# Altium PCB master.PcbDoc
Units mil, origin at the board's own origin, x right, y up, seen from the top; angles counter-clockwise.
Board outline 6000 x 4000 mil, 2 copper layers (Top Layer, Bottom Layer); 35 components, 49 nets, 164 pads, 10 vias.
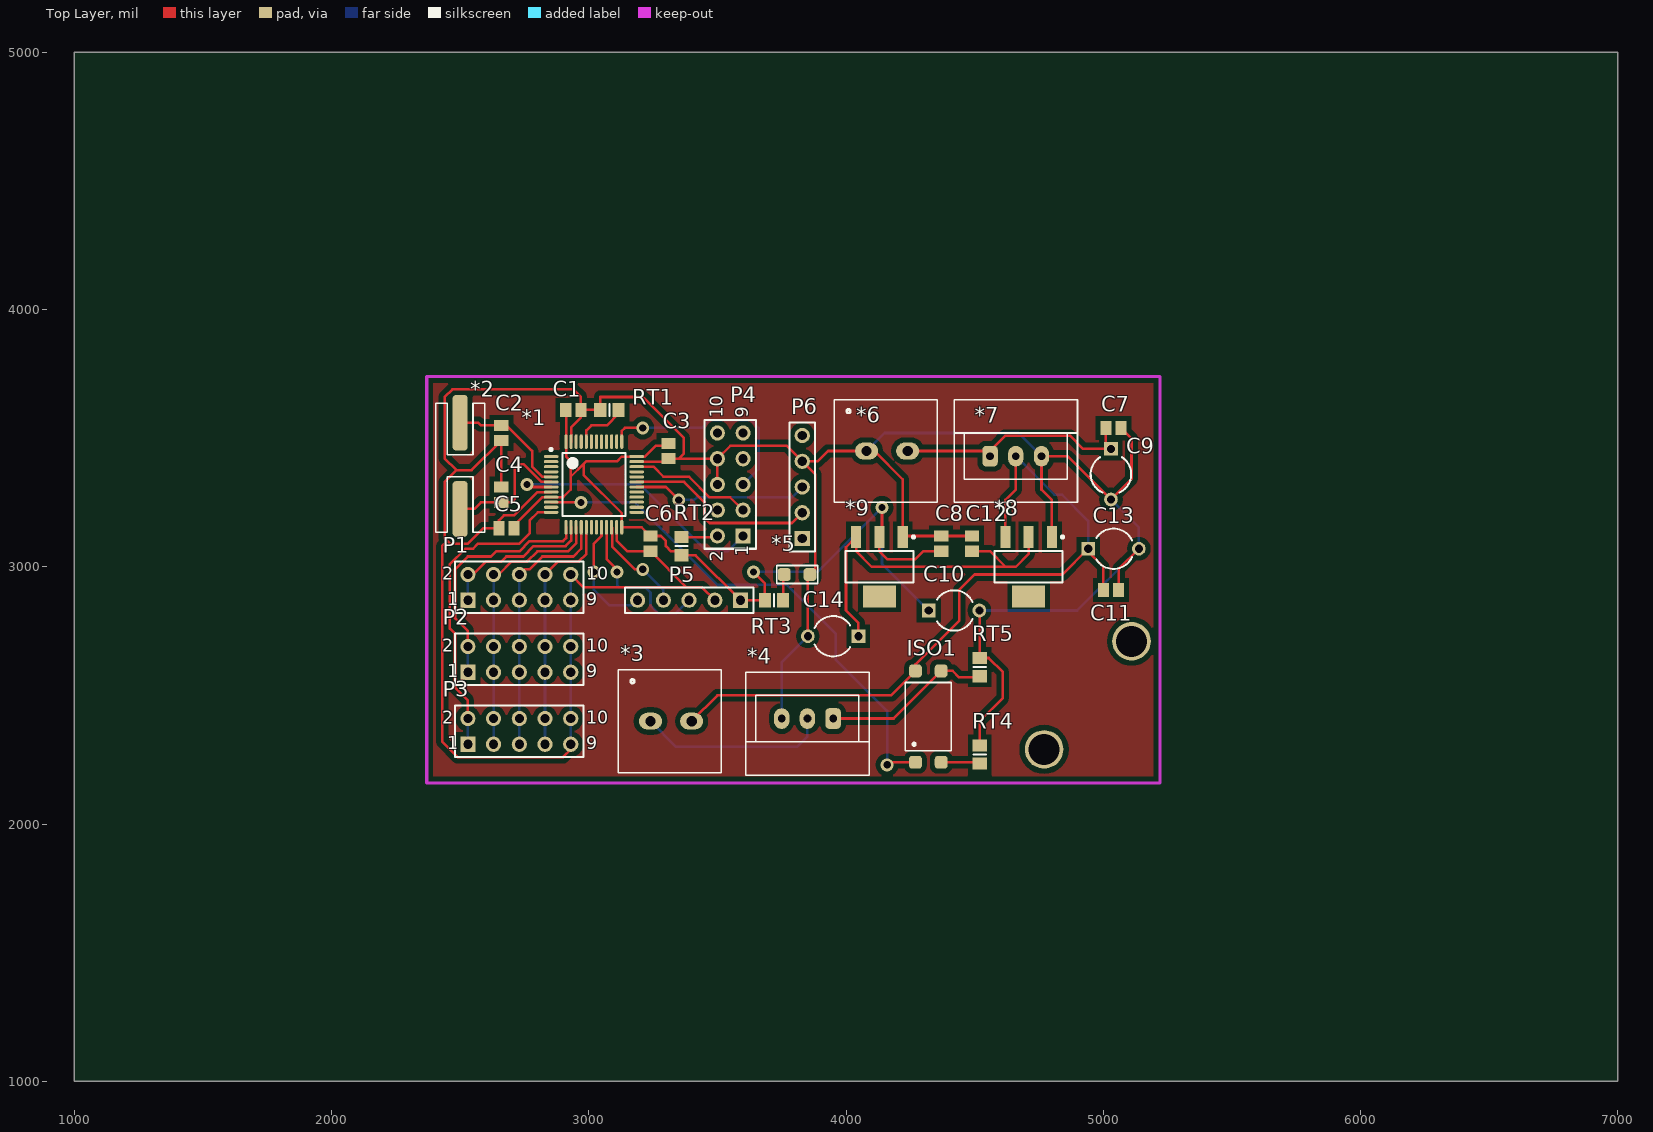
[diagram p0: Top Layer view]
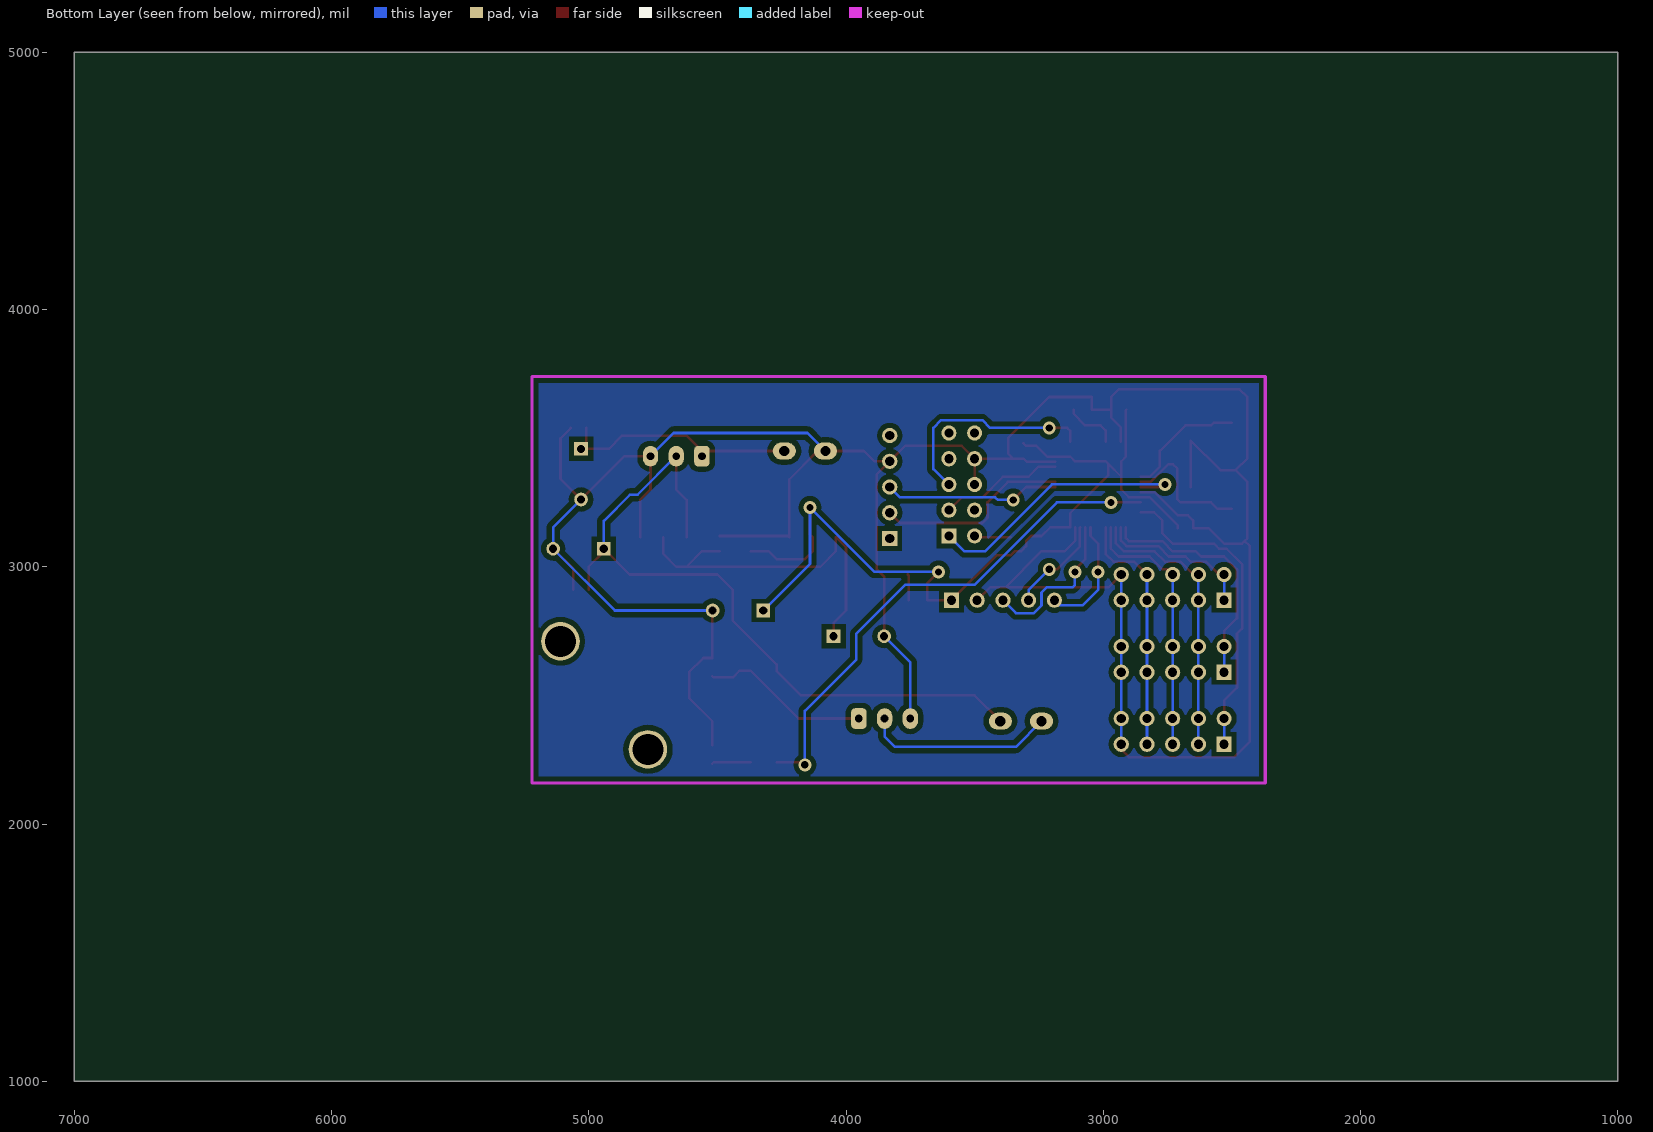
[diagram p1: Bottom Layer view, seen from below]

## Layer stack, top to bottom
Top Solder: solder mask 0.4, Solder Resist, Dk 3.5
Top Layer: signal copper 1.4
Dielectric 1: dielectric 12.6, FR-4, Dk 4.8
Bottom Layer: signal copper 1.4
Bottom Solder: solder mask 0.4, Solder Resist, Dk 3.5

## Board outline
1000,1000 7000,1000 7000,5000 1000,5000

## Design rules (kind name [scope] priority, off if disabled: settings)
Clearance "PolyGon Pour Clearance" [InPolyGon] p1: gap=20
Clearance [All] p2: gap=7
Height [All] p1 off: minheight=0 maxheight=1000 prefheight=500
PolygonConnect [All] p1: connectstyle=Relief reliefconductorwidth=10 reliefentries=4 polygonreliefangle="90 Angle" airgapwidth=10
RoutingVias [All] p1: holewidth=28 width=50 viastyle="Through Hole" minholewidth=28 minwidth=50 maxholewidth=28 maxwidth=50
SolderMaskExpansion [All] p1: expansion=4
UnpouredPolygon [All] p1: allowunpoured=FALSE
Width [All] p1: maxlimit=25 minlimit=10 preferedwidth=11 minimp=50.000000 maximp=50.000000 favimp=50.000000
28 further rules are at their usual default settings.

## Components (designator, comment, footprint, x,y, rotation, side; value= is the part's Value field where it differs from the comment)
*1 "stm32f103c8t6" LQFP48_stm32 3020,3320 r0 top
*2 "XTAL" xtal_smd 2500,3560 r270 top
*3 "domino2" Domino_2 3240,2400 r0 top
*4 "IRF540N" TO220 3850,2410 r180 top
*5 "led_smd" led_smd 3810,2970 r0 top
*6 "domino2" Domino_2 4080,3450 r0 top
*7 "L7812" TO220 4660,3430 r0 top
*8 "ASM1117-5" SOT223 4710,3000 r270 top
*9 "ASM1117-5" SOT223 4130,3000 r270 top
C1 "Cap Pol3" C0805 2940,3610 r0 top
C2 "Cap Pol3" C0805 2660,3520 r270 top
C3 "Cap Pol3" C0805 3310,3450 r270 top
C4 "Cap Pol3" C0805 2660,3280 r90 top
C5 "Cap Pol3" C0805 2680,3150 r180 top
C6 "Cap Pol3" C0805 3240,3090 r270 top
C7 "Cap Pol3" C0805 5040,3540 r0 top
C8 "Cap Pol3" C0805 4370,3090 r90 top
C9 "Cap2" CAPR5-4X5 5030,3360 r270 top
C10 "Cap2" CAPR5-4X5 4420,2830 r0 top
C11 "Cap Pol3" C0805 5030,2910 r0 top
C12 "Cap Pol3" C0805 4490,3090 r90 top
C13 "Cap2" CAPR5-4X5 5040,3070 r0 top
C14 "Cap2" CAPR5-4X5 3950,2730 r180 top
ISO1 "opto" opto_smd 4270,2240 r90 top
P1 "Header 5X2" HDR2X5 2530,2870 r0 top
P2 "Header 5X2" HDR2X5 2530,2590 r0 top
P3 "Header 5X2" HDR2X5 2530,2310 r0 top
P4 "Header 5X2" HDR2X5 3600,3120 r90 top
P5 "Header 5" HDR1X5 3590,2870 r180 top
P6 "Header 5" HDR1X5 3830,3110 r90 top
RT1 "Res Thermal" 6-0805_N 3080,3610 r0 top
RT2 "Res Thermal" 6-0805_N 3360,3080 r270 top
RT3 "Res Thermal" 6-0805_N 3720,2870 r180 top
RT4 "Res Thermal" 6-0805_N 4520,2270 r90 top
RT5 "Res Thermal" 6-0805_N 4520,2610 r90 top

## Footprints (in the part's own frame and the unit in brackets; to place one, negate y for a bottom-side part, rotate by r counter-clockwise, add the part's x,y. Pads: shape width x height; smd on the part's side, far side on the other; paste and mask are expansions set on the pad)
6-0805_N [mm] "Chip Resistor, Body 2.0x1.2mm, IPC Medium Density"
  rect 1.2x1.4 smd: 1(-0.9,0) 2(0.9,0)
  silkscreen extent 0,-0.6 0,0.6, body extent -1.07,-0.7 1.07,0.7, height 0.7
C0805 [mm] "Chip Capacitor, Body 2.0x1.3mm, IPC High Density"
  rect 1.1x1.4 smd: 1(-0.75,0) 2(0.75,0)
  body extent -1.1,-0.72 1.1,0.72, height 1.4
CAPR5-4X5 [mm] "Capacitor; 2 Leads"
  rect 1.35x1.35 hole 0.8: 1(-2.5,0)
  round 1.35 hole 0.8: 2(2.5,0)
  silkscreen extent -1.69,-2 1.82,2
Domino_2 [mil]
  oval 90x65 hole 40: 1(0,0) 2(160,0)
  silkscreen extent -125,-200 275,200
HDR1X5 [mm] "Connector; Header; 5 Position"
  rect 1.5x1.5 hole 0.9: 1(0,0)
  round 1.5 hole 0.9: 2(2.54,0) 3(5.08,0) 4(7.62,0) 5(10.16,0)
  silkscreen extent -1.27,-1.27 11.43,1.27
HDR2X5 [mm] "Connector; Header; 5x2 Position"
  rect 1.5x1.5 hole 0.9: 1(0,0)
  round 1.5 hole 0.9: 2(0,2.54) 3(2.54,0) 4(2.54,2.54) 5(5.08,0) 6(5.08,2.54) 7(7.62,0) 8(7.62,2.54) 9(10.16,0) 10(10.16,2.54)
  silkscreen extent -1.27,-1.27 11.43,3.81
led_smd [mil]
  rrect50% 50x50 smd: 1(-50,0) 2(50,0)
  silkscreen extent -80,-35 80,35
LQFP48_stm32 [mm] "TSQFP, 48-Leads, Body 7.00x7.00mm, Pitch 0.50mm, IPC Medium Density"
  oval 1.45x0.3 smd: 1(-4.225,2.75) 2(-4.225,2.25) 3(-4.225,1.75) 4(-4.225,1.25) 5(-4.225,0.75) 6(-4.225,0.25) 7(-4.225,-0.25) 8(-4.225,-0.75) 9(-4.225,-1.25) 10(-4.225,-1.75) 11(-4.225,-2.25) 12(-4.225,-2.75) 25(4.225,-2.75) 26(4.225,-2.25) 27(4.225,-1.75) 28(4.225,-1.25) 29(4.225,-0.75) 30(4.225,-0.25) 31(4.225,0.25) 32(4.225,0.75) 33(4.225,1.25) 34(4.225,1.75) 35(4.225,2.25) 36(4.225,2.75)
  oval 0.3x1.45 smd: 13(-2.75,-4.225) 14(-2.25,-4.225) 15(-1.75,-4.225) 16(-1.25,-4.225) 17(-0.75,-4.225) 18(-0.25,-4.225) 19(0.25,-4.225) 20(0.75,-4.225) 21(1.25,-4.225) 22(1.75,-4.225) 23(2.25,-4.225) 24(2.75,-4.225) 37(2.75,4.225) 38(2.25,4.225) 39(1.75,4.225) 40(1.25,4.225) 41(0.75,4.225) 42(0.25,4.225) 43(-0.25,4.225) 44(-0.75,4.225) 45(-1.25,4.225) 46(-1.75,4.225) 47(-2.25,4.225) 48(-2.75,4.225)
  silkscreen extent -4.35,-3.1 3.1,3.57, body extent -3.5,-3.5 3.5,3.5, height 1.6
opto_smd [mil]
  rrect50% 50x50 smd: 1(0,0) 2(0,-100) 3(355,-100) 4(355,0)
  silkscreen extent 45,-140 310,40
SOT223 [mm] "SOT223, 4-Leads, Body 6.50x7.00mm (avg), Pitch 2.30mm, IPC Medium Density"
  rect 2.15x1 smd: 1(-2.93,2.3) 2(-2.93,0) 3(-2.93,-2.3)
  rect 2.15x3.25 smd: 4(2.93,0)
  silkscreen extent -3.05,-3.35 1.55,3.48, body extent -1.86,-3.35 1.86,3.35, height 1.8
TO220 [mil]
  rrect50% 60x80 hole 30: 1(-100,0)
  oval 60x80 hole 30: 2(0,0) 3(100,0)
  silkscreen extent -240,-180 240,220
xtal_smd [mil]
  rrect50% 217x59 smd: 1(0,0) 2(335,0)
  silkscreen extent -75,-95 425,95

## Part data
C1 C2 C3 C4 C5 C6 C7 C8 C11 C12: "Polarized Capacitor (Surface Mount)"
C9 C10 C13 C14: "Capacitor"
P1 P2 P3 P4: "Header, 5-Pin, Dual row"
P5 P6: "Header, 5-Pin"
RT1 RT2 RT3 RT4 RT5: "Thermistor"

## Free pads (board coordinates)
  round 150 hole 120: 0(4770,2290) 1(5110,2710)

## Via types
v1: diameter 50, hole 28, Top Layer to Bottom Layer, 10 vias

## Nets (pads, with @x,y where several pads share a name; then routed paths per layer and width w, separated by ;. In a path a pad name is that pad's centre, name@x,y a point inside that pad or via, vN(x,y) a via of type N, cw(c..) or ccw(c..) an arc to the next point about the centre after c; other vN are vias at no path point)
5V: *8.2 *9.3 C12.1 C14.1 | length 1413.3
  Top Layer w10: C14.1 4048.43,2781.57 4000,2830 4000,3075.91 *9.3 4039.45,3060.55 4100,3000 4660,3000 4710,3050 *8.2 ; C12.1 4559.53,3060.47 4620,3000
12V: *3.2 *7.2 *8.3 C11.1 C13.1 ISO1.4 | length 2924.1
  Top Layer w10: *3.2 3500,2500 4175,2500 ISO1.4 4270,2620 4440,2790 4440,2910 4500,2970 4841.57,2970 C13.1 4941.57,3058.9 5000.47,3000 C11.1 ; *8.3 4619.45,3259.45 4660,3300 *7.2 *7.2@4670,3430
  Bottom Layer w10: *7.2 4810,3280 4840,3280 4941.57,3178.43 C13.1
24V: *6.2 *7.1 C7.1 C9.1 | length 954.2
  Top Layer w10: *6.2 4540,3450 *7.1 4560,3450 4620,3510 4870,3510 4921.57,3458.43 C9.1 5010.47,3477.95 C7.1
GND: *1.8 *1.23 *1.35 *1.47 *4.3 *5.2 *6.1 *7.3 *8.1 *9.1 C1.2 C2.2 C3.2 C4.2 C5.2 C6.2 C7.2 C8.2 C9.2 C10.2 C11.2 C12.2 C13.2 C14.2 P1.9 P1.10 P2.9 P2.10 P3.9 P3.10 P4.6 P4.8 P5.2 P6.4 RT1.1 RT4.2 RT5.2 | length 12200
  Top Layer w10: C4.2 C2.2 2545.03,3375.5 2485.5,3375.5 ; *1.8 2800.47,3290.47 2710,3200 2670,3200 2650.47,3180.47 C5.2 2590,3150 2530,3090 2460,3090 2450,3100 ; P3.9 2930,2290 2900,2260 2490,2260 2430,2320 2430,3080 2450,3100 ; P1.10 2980,2920 3380.47,2920 ; *1.47 2931.42,3541.42 2969.53,3579.53 C1.2 ; *1.23 3108.58,3101.42 3149.53,3060.47 C6.2 3380.47,2920 ; *1.35 3298.11,3408.58 C3.2 3350,3420.47 ; P5.2 3440,2920 3380.47,2920 ; P4.6 P4.8 ; C14.2 3851.57,2961.57 *5.2 3880,2990 3880,3360 P6.4 ; C12.2 C8.2 4224.72,3119.53 *9.1 4220.55,3339.45 4110,3450 *6.1 3930,3450 3890,3410 P6.4 ; C10.2 4520,2828.43 RT5.2 4554.57,2645.43 4610,2590 4610,2490 4520,2400 RT4.2 ; *8.1 4800.55,3259.45 4760,3300 *7.3 4861.57,3430 C9.2 5110,3341.57 5110,3499.53 C7.2 ; C11.2 5059.53,2991.1 C13.2 ; 2450,3100 2440,3110 2440,3330 2485.5,3375.5 ; 2485.5,3375.5 2440,3421 2440,3660 2470,3690 2940,3690 2969.53,3660.47 C1.2 ; C1.2 RT1.1 3044.57,3660 3210,3660 3370,3500 3370,3440.47 3350,3420.47 ; 3350,3420.47 3499.53,3420.47 P4.8 ; P4.8 3550,3470 3770,3470 P6.4
  Bottom Layer w10: P3.9 P3.10 P2.9 P2.10 P1.9 P1.10 ; *4.3 3750,2628.43 C14.2 ; *6.1 4150,3520 4670,3520 *7.3 ; C10.2 4898.43,2830 C13.2 5138.43,3153.15 C9.2
Net*1_5: *1.5 *2.1 C2.1 | length 476
  Top Layer w10: *2.1 2570,3560 2580.47,3549.53 C2.1 2680.47,3549.53 2780,3450 2780,3390 2820.47,3349.53 *1.5
Net*1_6: *1.6 *2.2 C4.1 | length 523.8
  Top Layer w10: *2.2 2555,3225 2580.47,3250.47 C4.1 2700.47,3250.47 2712.02,3262.02 2712.02,3382.02 2727.98,3397.98 2747.98,3397.98 2816.12,3329.84 *1.6
Net*1_44: *1.44 RT1.2 | length 210.6
  Top Layer w10: *1.44 2990.47,3530.47 3010,3550 3070,3550 3115.43,3595.43 RT1.2
Net*3_1: *3.1 *4.2 | length 738
  Bottom Layer w10: *3.1 3340,2300 3810,2300 3850,2340 *4.2
Net*4_1: *4.1 ISO1.3 RT5.1 | length 658.9
  Top Layer w10: *4.1 4185,2410 ISO1.3 4415,2595 4440,2570 4515.43,2570 RT5.1
Net*5_1: *5.1 RT3.1 | length 101.9
  Top Layer w10: RT3.1 3755.43,2965.43 *5.1
NetISO1_2: ISO1.2 RT4.1 | length 152.3
  Top Layer w10: ISO1.2 4514.57,2240 RT4.1
NetP4_2: P4.2 RT2.1 | length 141.9
  Top Layer w10: RT2.1 3495.43,3115.43 P4.2
NRST: *1.7 P4.1 | length 1084.4
  Top Layer w10: v1(2760,3320) 2760,3330 2779.84,3310.16 *1.7
  Bottom Layer w10: v1(2760,3320) 3200,3320 3460,3060 3540,3060 P4.1
PA0: *1.10 ISO1.1 | length 2025
  Top Layer w10: *1.10 2968.9,3251.1 v1(2970,3250) ; v1(4160,2230) 4170,2240 ISO1.1
  Bottom Layer w10: v1(2970,3250) 3180,3250 3500,2930 3770,2930 3960,2740 3960,2640 4160,2440 v1(4160,2230)
PA1: *1.11
PA2: *1.12 P3.1 P3.2 | length 1235.5
  Top Layer w10: P3.2 2530,2480 2480,2530 2480,2740 2460,2760 2460,3010 2520,3070 2550,3070 2570,3090 2730,3090 2770,3130 2770,3180 2801.73,3211.73 *1.12
  Bottom Layer w10: P3.1 P3.2
PA3: *1.13 P2.1 P2.2 | length 944.8
  Top Layer w10: P2.2 2530,2750 2480,2800 2480,2990 2530,3040 2620,3040 2640,3060 2730,3060 2770,3100 2900,3100 2911.73,3111.73 *1.13
  Bottom Layer w10: P2.1 P2.2
PA4: *1.14 P1.1 P1.2 | length 608.1
  Top Layer w10: P1.2 2550,2970 2600,3020 2660,3020 2680,3040 2745.96,3040 2785.96,3080 2910,3080 2931.42,3101.42 *1.14
  Bottom Layer w10: P1.1 P1.2
PA5: *1.15 P1.3 P1.4 P2.3 P2.4 P3.3 P3.4 | length 1093.8
  Top Layer w10: P1.4 2650,2970 2700,3020 2760,3020 2800,3060 2920,3060 2927.78,3067.78 2943.33,3083.33 2951.1,3091.1 *1.15
  Bottom Layer w10: P3.3 P3.4 P2.3 P2.4 P1.3 P1.4
PA6: *1.16 P1.5 P1.6 P2.5 P2.6 P3.5 P3.6 | length 1025.4
  Top Layer w10: P1.6 2750,2990 2770,2990 2820,3040 2940,3040 2970.79,3070.79 *1.16
  Bottom Layer w10: P3.5 P3.6 P2.5 P2.6 P1.5 P1.6
PA7: *1.17 P1.7 P1.8 P2.7 P2.8 P3.7 P3.8 | length 957
  Top Layer w10: P1.8 2880,3020 2960,3020 2990.47,3050.47 *1.17
  Bottom Layer w10: P3.7 P3.8 P2.7 P2.8 P1.7 P1.8
PA8: *1.29
PA9: *1.30 P6.3 | length 685.1
  Top Layer w10: *1.30 3299.84,3310.16 v1(3350,3260)
  Bottom Layer w10: v1(3350,3260) 3410,3260 3420,3270 3790,3270 P6.3
PA10: *1.31 P6.2 | length 761.6
  Top Layer w10: *1.31 3370.16,3329.84 3450,3250 3450,3190 3470,3170 3790,3170 P6.2
PA11: *1.32
PA12: *1.33
PA15: *1.38
PB0: *1.18
PB1: *1.19
PB2: *1.20 P5.5 | length 459
  Top Layer w10: v1(3020,2980) 3020,3090 3049.53,3119.53 *1.20
  Bottom Layer w10: v1(3020,2980) 3020,2910 3080,2850 3170,2850 P5.5
PB3: *1.39
PB4: *1.40
PB5: *1.41
PB6: *1.42
PB7: *1.43
PB8: *1.45
PB9: *1.46
PB10: *1.21 P5.3 | length 616.1
  Top Layer w10: *1.21 3069.21,3030.79 3110,2990 v1(3110,2980)
  Bottom Layer w10: v1(3110,2980) 3110,2930 3120,2920 3220,2920 3240,2900 3240,2850 3270,2820 3340,2820 P5.3
PB11: *1.22 P5.4 | length 384.5
  Top Layer w10: *1.22 3090.68,3151.88 3090.68,3079.32 3180,2990 v1(3210,2990)
  Bottom Layer w10: v1(3210,2990) 3290,2910 P5.4
PB12: *1.25
PB13: *1.26
PB14: *1.27
PB15: *1.28
PC13: *1.2
PC14: *1.3
PC15: *1.4
SWC: *1.37 P4.5 | length 848.2
  Top Layer w10: *1.37 3128.27,3528.27 3140,3540 v1(3210,3540)
  Bottom Layer w10: v1(3210,3540) 3440,3540 3470,3570 3630,3570 3660,3540 3660,3380 P4.5
SWD: *1.34 P4.3 | length 483.6
  Top Layer w10: *1.34 3251.1,3388.9 3290,3350 3390,3350 3470,3270 3550,3270 P4.3
VCC: *1.9 *1.24 *1.36 *1.48 *9.2 C1.1 C3.1 C5.1 C6.1 C8.1 C10.1 P5.1 RT2.2 RT3.2 | length 3679.6
  Top Layer w10: C5.1 2709.53,3159.53 2820.79,3270.79 *1.9 2900.79,3270.79 2930,3300 2930,3350 ; C1.1 2911.73,3608.74 *1.48 2911.73,3428.27 2930,3410 2930,3350 ; C3.1 3300.47,3470 3260,3470 3218.27,3428.27 *1.36 3128.27,3428.27 3110,3410 2990,3410 2980,3400 ; v1(3640,2980) 3684.57,2935.43 RT3.2 P5.1 3415.43,3044.57 RT2.2 3344.57,3060 3320,3060 3300,3080 3300,3100 3280.47,3119.53 C6.1 3205.87,3153.66 *1.24 3128.27,3208.27 2980,3356.54 2980,3400 ; v1(4140,3230) 4140,3125.35 *9.2 4130,3060 4160,3030 4270,3030 4300.47,3060.47 C8.1 ; 2930,3350 2980,3400
  Bottom Layer w10: v1(3640,2980) 3890,2980 v1(4140,3230) 4140,3011.57 C10.1
pads on no net: *1.1 *8.4 *9.4 P4.4 P4.7 P4.9 P4.10 P6.1 P6.5

## Polygon pours and split planes (outlines as drawn)
no net on Bottom Layer "Keep-Out Layer-No Net" (solid, pour order 4): 2370,3740 5220,3740 5220,2160 2380,2160 2370,2170
no net on Top Layer "Keep-Out Layer-No Net" (solid, pour order 4): 2370,3740 5220,3740 5220,2160 2370,2160

## Keep-outs
Keep-Out Layer:
  lines w12: 2370,2160 2370,3710 2370,3740 5220,3740 5220,3680 5220,2160 2370,2160

## Text inside footprints (layer, text, board x,y; h text height)
P1: Top Overlay "2" at 2430,2950 h50; Top Overlay "1" at 2450,2850 h50; Top Overlay "9" at 2990,2850 h50; Top Overlay "10" at 2990,2950 h50
P2: Top Overlay "2" at 2430,2670 h50; Top Overlay "1" at 2450,2570 h50; Top Overlay "9" at 2990,2570 h50; Top Overlay "10" at 2990,2670 h50
P3: Top Overlay "2" at 2430,2390 h50; Top Overlay "1" at 2450,2290 h50; Top Overlay "9" at 2990,2290 h50; Top Overlay "10" at 2990,2390 h50
P4: Top Overlay "2" at 3520,3020 h50 r90; Top Overlay "1" at 3620,3040 h50 r90; Top Overlay "9" at 3620,3580 h50 r90; Top Overlay "10" at 3520,3580 h50 r90